# Altium PCB PCB1.PcbDoc
Units mm, origin at the board's own origin, x right, y up, seen from the top; angles counter-clockwise.
Board outline 109.75 x 109.75 mm, 2 copper layers (Top Layer, Bottom Layer); 13 components, 6 nets, 45 pads, 1 vias.
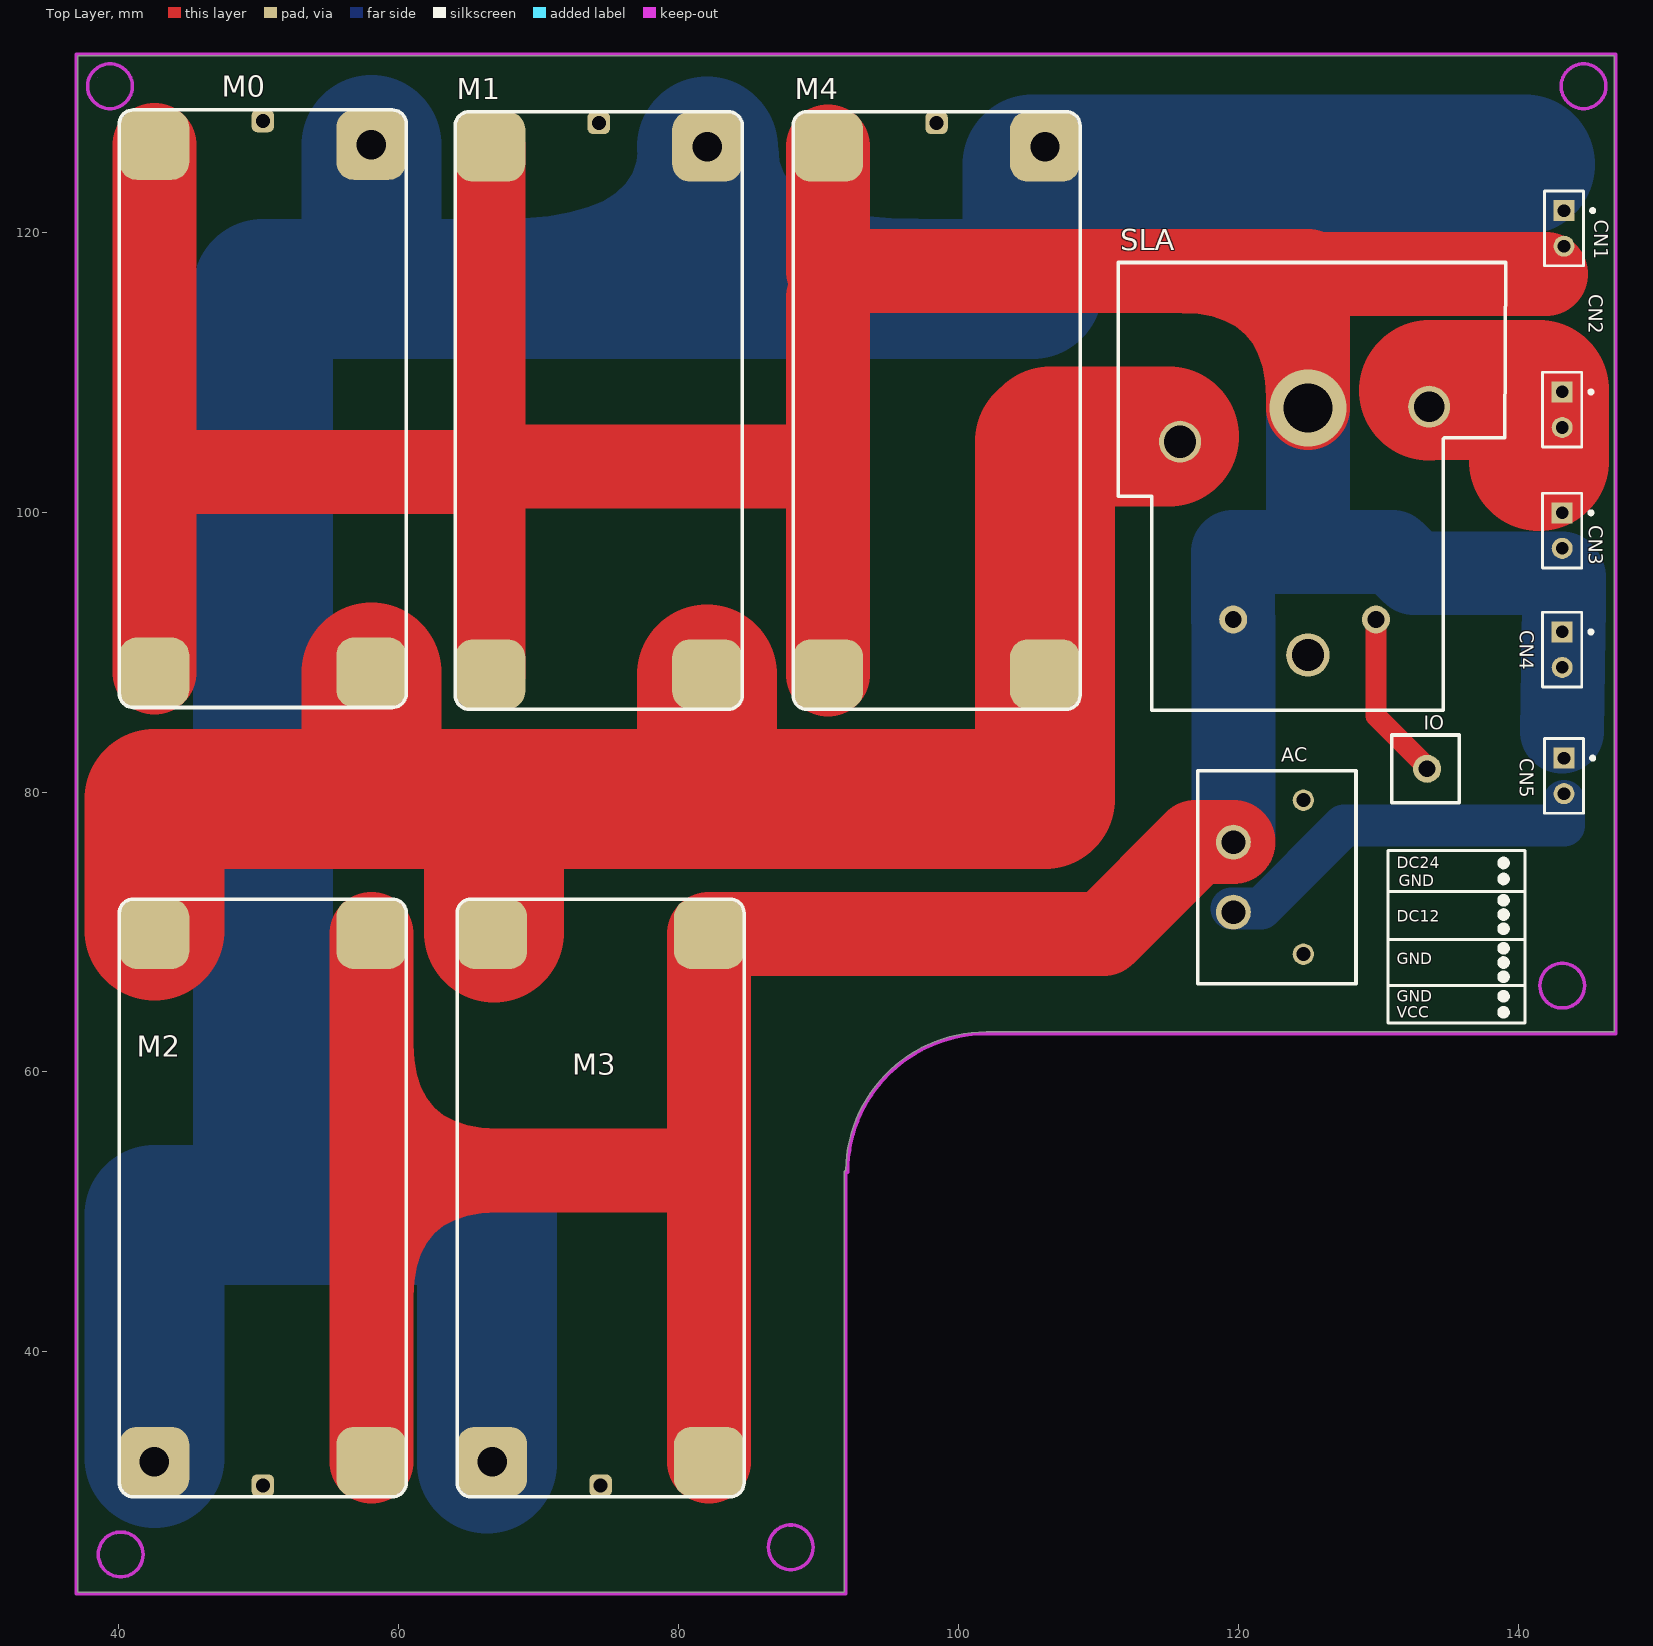
[diagram p0: Top Layer view]
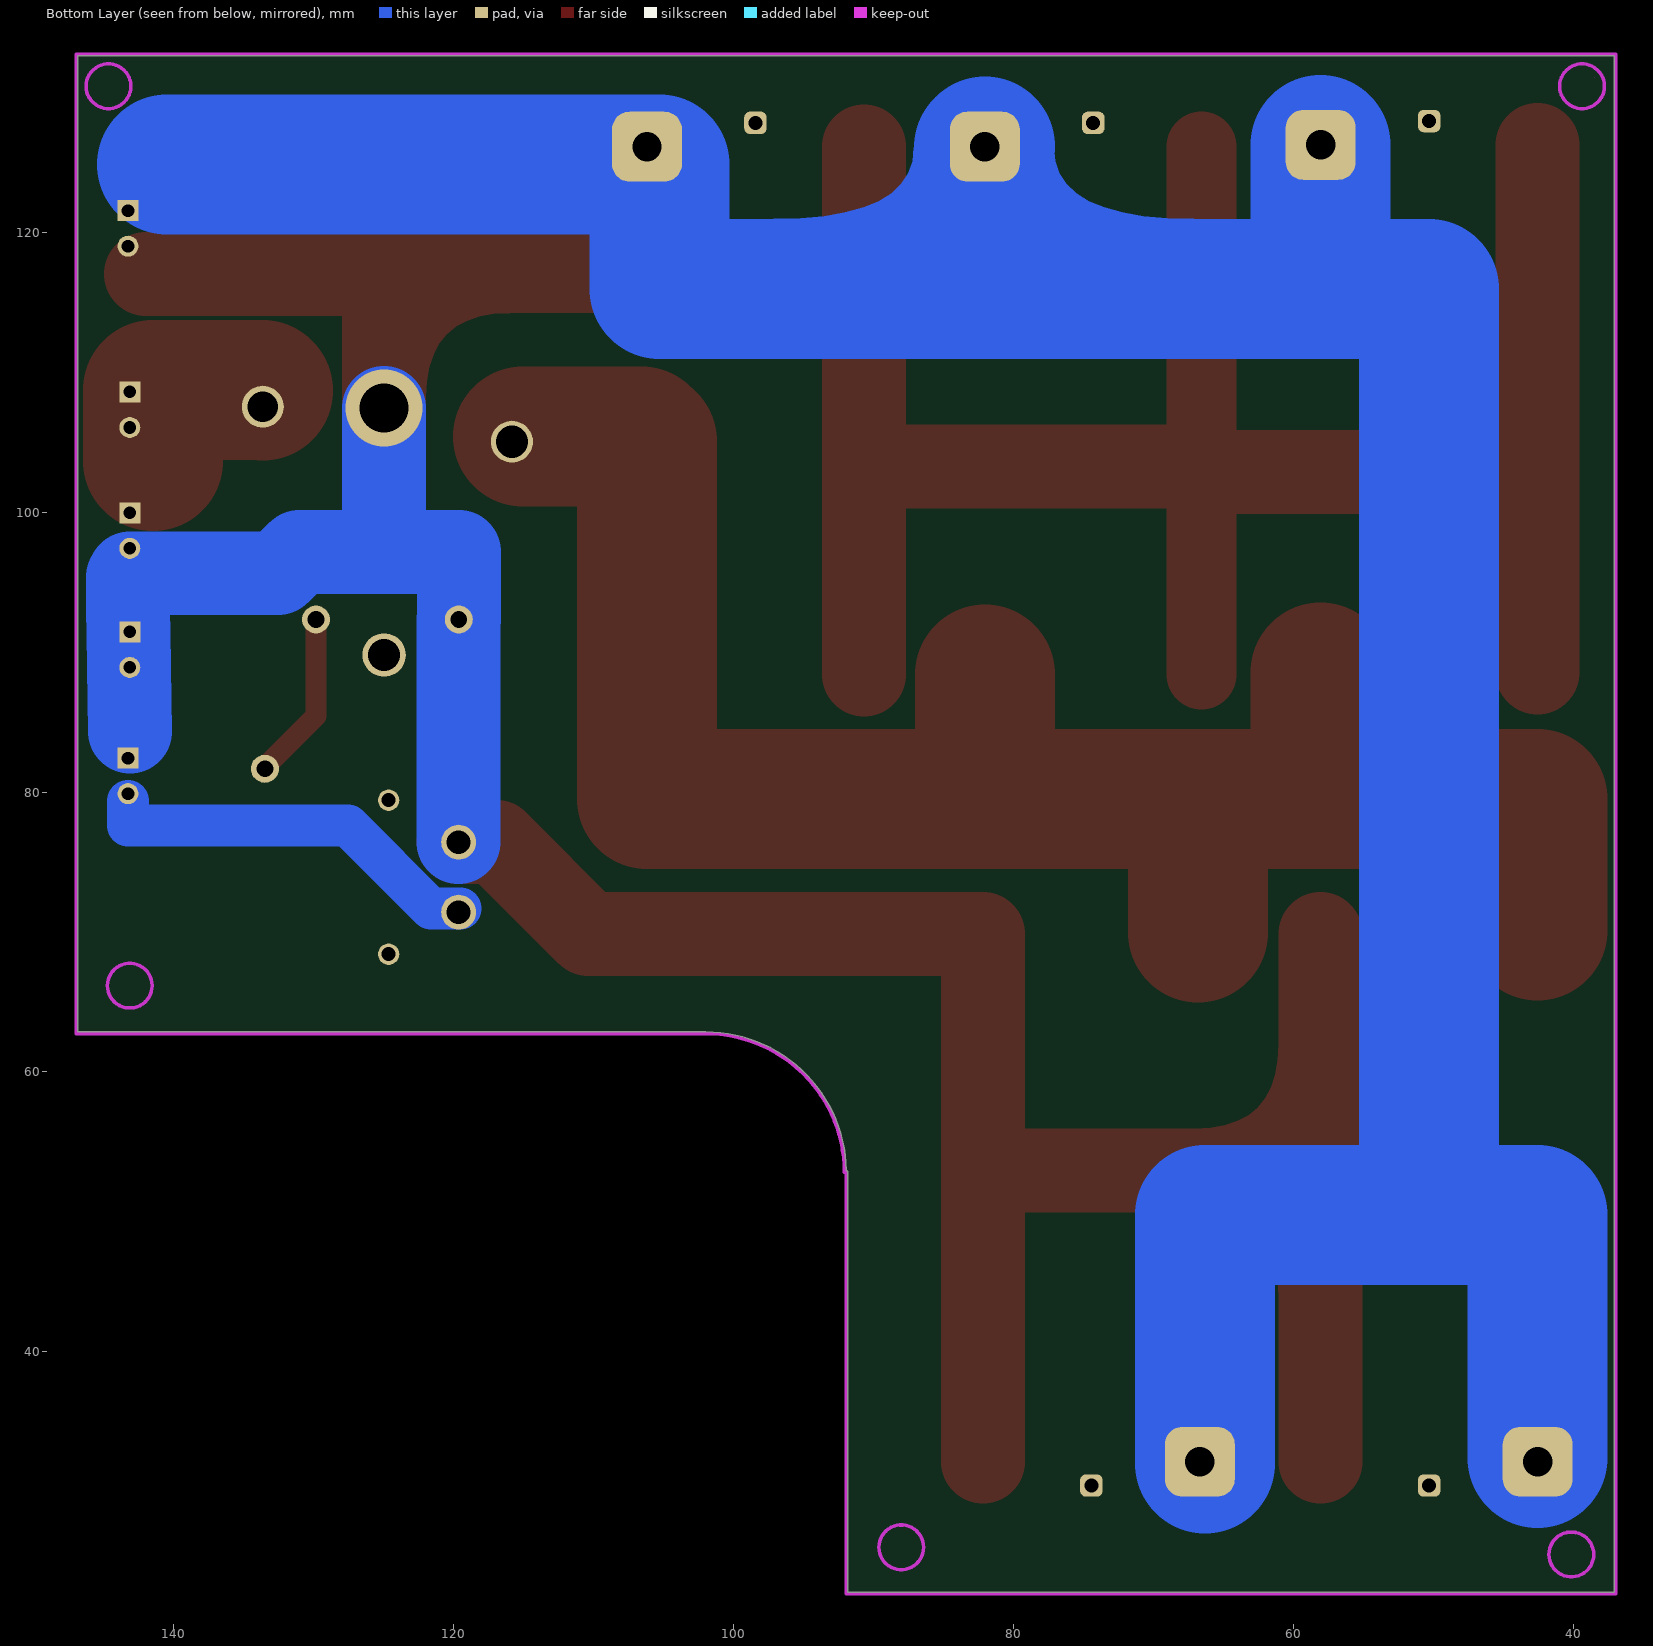
[diagram p1: Bottom Layer view, seen from below]

## Layer stack, top to bottom
Top Solder: solder mask 0.0102, Solder Resist, Dk 3.5
Top Layer: signal copper 0.0356
Dielectric 1: dielectric 0.32, FR-4, Dk 4.8
Bottom Layer: signal copper 0.0356
Bottom Solder: solder mask 0.0102, Solder Resist, Dk 3.5

## Board outline
37.084,22.842 37.084,132.588 146.83,132.588 146.83,62.865 101.991,62.865 ccw(c101.991,52.82) 91.947,52.958 ccw(c91.948,52.83) 91.821,52.83 91.821,22.842
cut-out: 38.481,131.064

## Design rules (kind name [scope] priority, off if disabled: settings)
Clearance [All] p1: gap=0.254 ignorepadtopadclearanceinfootprint=FALSE
PolygonConnect [All] p1: connectstyle=Relief reliefconductorwidth=0.254 reliefentries=4 polygonreliefangle="90 Angle" airgapwidth=0.254
RoutingVias [All] p1: holewidth=0.711 width=1.27 viastyle="Through Hole" minholewidth=0.711 minwidth=1.27 maxholewidth=0.711 maxwidth=1.27
SolderMaskExpansion [All] p1: expansion=0.102
Width [All] p1: maxlimit=15 minlimit=0.2 preferedwidth=1 minimp=50.000000 maximp=50.000000 favimp=50.000000
30 further rules are at their usual default settings.

## Classes and differential pairs
component class Sheet1: AC CN1 CN2 CN3 CN4 CN5 io M0 SLA

## Components (designator, comment, footprint, x,y, rotation, side; value= is the part's Value field where it differs from the comment)
AC "AC/GND" AC/GND 119.634,73.914 r0 top (schematic designator AC/GND)
CN1 "MKDSN1.5/2-5.08" Pin2 143.256,121.539 r270 top
CN2 "MKDSN1.5/2-5.08" Pin2 143.129,108.585 r270 top
CN3 "MKDSN1.5/2-5.08" Pin2 143.129,99.949 r270 top
CN4 "MKDSN1.5/2-5.08" Pin2 143.129,91.44 r270 top
CN5 "MKDSN1.5/2-5.08" Pin2 143.256,82.423 r270 top
IO "I/O" PIN0 133.477,81.661 r0 top (schematic designator PIN0)
M0 "PM" PM 40.039,128.738 r270 top
M1 "PM" PM 64.042,128.611 r270 top
M2 "PM" PM 60.539,29.65 r90 top
M3 "PM" PM 84.675,29.65 r90 top
M4 "PM" PM 88.178,128.611 r270 top
SLA "24V" SLA 124.841,97.513 r0 top

## Footprints (in the part's own frame and the unit in brackets; to place one, negate y for a bottom-side part, rotate by r counter-clockwise, add the part's x,y. Pads: shape width x height; smd on the part's side, far side on the other; paste and mask are expansions set on the pad)
AC/GND [mm]
  round 2.5 hole 1.7: 0(0,2.5) 1(0,-2.5)
  round 1.524 hole 1: 2(5,5.5) 3(5,-5.5)
  silkscreen extent -2.54,-7.62 8.76,7.62
PIN0 [mm]
  round 2 hole 1.2: 0(0,0)
  silkscreen extent -2.54,-2.41 2.29,2.41
Pin2 [mm] "Photosensitive Diode; 2 Leads"
  rect 1.5x1.5 hole 0.9: 1(0,0)
  round 1.5 hole 0.9: 2(2.54,0)
  silkscreen extent -1.4,-1.4 3.94,2.18
PM [mm]
  rrect50% 5x5 hole 2.1: 1(2.5,18)
  rrect50% 1.6x1.6 hole 1: 2(0.8,10.25)
  rrect50% 5x5 smd: 3(2.5,2.5) 4(40.2,2.5) 5(40.2,18)
  silkscreen extent 0,0 42.7,20.5
SLA [mm]
  round 2 hole 1.2: 0(-5.217,-5.184) 1(4.983,-5.184)
  round 3 hole 2.3: 2(-9.017,7.516)
  round 3 hole 2.2: 3(8.783,10.016)
  round 3.1 hole 2.3: 4(0.117,-7.724)
  silkscreen extent -13.42,-11.68 14.27,20.32

## Part data
CN1 CN2 CN3 CN4 CN5: BOM_Manufacturer="Phoenix Contact", BOM_Assembly Type=manualWeld, BOM_Manufacturer Part=MKDSN1.5/2-5.08, BOM_Paste Type=expand, BOM_Supplier=LCSC, BOM_Supplier Part=C91153, spicePre=C, spiceSymbolName=MKDSN1.5/2-5.08
IO: library part PIN0
SLA: library part SLA

## Via types
v1: diameter 5.5, hole 3.5, Top Layer to Bottom Layer, 1 vias

## Nets (pads, with @x,y where several pads share a name; then routed paths per layer and width w, separated by ;. In a path a pad name is that pad's centre, name@x,y a point inside that pad or via, vN(x,y) a via of type N, cw(c..) or ccw(c..) an arc to the next point about the centre after c; other vN are vias at no path point)
GND: AC.0 CN1.2 CN3.2 CN4.1 CN4.2 CN5.1 M0.3 M0.4 M1.3 M1.4 M2.3 M2.4 M3.3 M3.4 M4.3 M4.4 SLA.0 | length 429.4
  Top Layer w1: 65.913,103.251 66.294,102.87 ; 66.542,102.622 66.294,102.87 ; 66.542,103.118 66.294,102.87 ; 81.921,52.959 82.175,53.213
  Top Layer w5: M1.4 66.542,102.622 ; 66.542,103.118 66.542,103.251 M1.3
  Top Layer w6: M0.4 42.539,102.87 ; M0.3 42.539,102.87 ; M2.3 58.039,52.959 ; M2.4 58.039,52.959 ; 65.913,103.251 66.542,103.251 90.678,103.251 90.678,115.316 ; 66.294,102.87 42.539,102.87 ; 81.921,52.959 58.039,52.959 ; M3.3 82.175,53.213 M3.4 110.363,69.85 116.927,76.414 AC.0 ; M4.4 90.678,102.87 ; M4.3 90.678,118.491 90.678,117.221 124.968,117.221 ; v1(124.968,107.442) 124.968,117.221 ; 141.986,117.027 125.162,117.027 124.968,117.221
  Bottom Layer w1: SLA.0 SLA.0@119.629,92.324 ; AC.0@119.629,76.419 AC.0 ; CN3.2 143.129,95.631 143.256,95.377 ; CN5.1@143.192,82.486 CN5.1
  Bottom Layer w6: SLA.0 119.624,97.165 124.968,97.165 ; AC.0@119.629,76.419 SLA.0@119.629,92.324 ; v1(124.968,107.442) 124.968,97.165 ; 143.129,84.328 143.197,88.899 143.235,91.438 143.256,92.837 143.256,95.377 ; 143.129,95.631 132.538,95.631 131.004,97.165 124.968,97.165
NetAC/GND_1: AC.1 CN5.2 | length 28
  Bottom Layer w3: AC.1@119.507,71.665 121.598,71.665 127.53,77.597 143.256,77.597 CN5.2@143.256,79.375
NetCN1_1: CN1.1 M0.1 M1.1 M2.1 M3.1 M4.1 | length 244
  Bottom Layer w1: 42.539,43.428 42.545,43.434
  Bottom Layer w10: M2.1@42.539,32.404 42.539,43.428 42.539,49.778 50.292,49.778 66.294,49.778 M3.1@66.294,32.023 ; 50.292,50.419 50.292,115.951 58.039,115.951 ; M0.1 58.039,115.951 ; M1.1 82.105,126.047 82.105,115.951 ; 140.462,124.841 105.283,124.841 105.283,115.951 82.105,115.951 ; 58.039,115.951 82.105,115.951
NetCN2_1: CN2.1 CN2.2 CN3.1 SLA.3 | length 12.9
  Top Layer w10: SLA.3@133.624,108.695 133.641,108.712 141.478,108.712 141.478,103.632
NetM0_5: M0.5 M1.5 M2.5 M3.5 M4.5 SLA.2 | length 133.6
  Top Layer w1: 106.178,105.029 106.559,105.41
  Top Layer w10: M2.5@42.539,70.104 42.539,79.502 58.039,79.502 ; M0.5 58.039,79.502 ; M3.5@66.802,69.977 66.802,78.099 ; M1.5 82.042,79.502 ; 106.178,105.029 M4.5 106.172,88.405 106.172,79.502 82.042,79.502 ; 106.559,105.41 SLA.2@115.039,105.41 ; 58.039,79.502 82.042,79.502
NetPIN0_0: IO.0 SLA.1 | length 12.1
  Top Layer w1.5: SLA.1 129.824,85.441 IO.0@133.541,81.724
pads on no net: AC.2 AC.3 M0.2 M1.2 M2.2 M3.2 M4.2 SLA.4

## Keep-outs
Keep-Out Layer:
  circle w0.254: c143.129,66.167 r1.6
  circle w0.254: c144.653,130.429 r1.6
  circle w0.254: c39.37,130.429 r1.6
  circle w0.254: c40.132,25.527 r1.6
  circle w0.254: c88.011,26.035 r1.6
  lines w0.254: 91.948,52.83 91.948,22.715 36.957,22.715 36.957,132.715 146.957,132.715 146.957,62.738 101.991,62.738 ; 92.074,52.83 cw(c101.991,52.82) 102.032,62.738

## Silkscreen, mask and mechanical layers (free items; w line width, h text height)
Top Overlay:
  circle w0.5: c138.938,64.262 r0.2
  circle w0.5: c138.938,65.405 r0.2
  circle w0.5: c138.938,66.802 r0.2
  circle w0.5: c138.938,67.818 r0.2
  circle w0.5: c138.938,68.834 r0.2
  circle w0.5: c138.938,70.231 r0.2
  circle w0.5: c138.938,71.247 r0.2
  circle w0.5: c138.938,72.263 r0.2
  circle w0.5: c138.938,73.787 r0.2
  circle w0.5: c138.938,74.93 r0.2
  lines w0.2: 130.683,69.469 140.335,69.469 ; 130.683,72.898 140.462,72.898 ; 130.81,66.167 140.462,66.167 ; 130.683,63.5 130.683,75.819 140.462,75.819 140.462,63.5 130.683,63.5
  text "DC24" at 131.318,74.549 h0.8
  text "GND" at 131.445,73.279 h0.8
  text "DC12" at 131.318,70.739 h0.8
  text "GND" at 131.318,67.691 h0.8
  text "GND" at 131.318,65.024 h0.8
  text "VCC" at 131.318,63.881 h0.8
Top Solder:
  lines w0.254: 42.539,79.877 42.914,79.502 ; 108.077,68.072 108.458,68.072 ; 110.363,69.215 110.363,70.485
  lines w6: 42.545,102.997 90.678,102.997 90.678,117.094 141.859,117.094 ; 58.039,52.832 82.169,52.832 82.169,69.723 110.49,69.723 117.221,76.454 119.624,76.454 ; 124.958,107.452 124.958,117.094
  lines w10: 42.914,79.502 104.521,79.502 106.178,81.159 106.178,105.41 115.443,105.41 115.824,105.029 ; 133.731,108.839 141.224,108.839 141.605,108.458 141.605,103.759
Bottom Solder:
  lines w0.254: 42.418,49.403 42.539,49.282 ; 66.421,32.404 66.675,32.15 ; 124.831,96.901 124.968,97.038 ; 132.588,95.885 132.842,95.631 ; 143.002,95.631 143.256,95.377
  lines w3: 119.507,71.628 121.666,71.628 127.508,77.47 143.256,77.47 143.256,79.248
  lines w6: 119.888,76.668 119.888,96.901 124.831,96.901 ; 124.587,96.901 131.572,96.901 132.588,95.885 ; 124.968,97.038 124.968,107.442 ; 132.842,95.631 143.002,95.631 ; 143.129,84.328 143.129,95.504
  lines w10: 42.418,49.403 66.167,49.403 ; 42.539,32.15 42.539,49.282 ; 50.165,49.911 50.165,115.443 50.419,115.697 104.902,115.697 104.902,124.587 ; 58.039,115.697 58.039,126.238 ; 66.421,32.404 66.421,49.403 ; 82.042,115.824 82.042,126.111 ; 105.029,124.587 140.208,124.587